# EAGLE board Adafruit PCB Reference Ruler - Edited (EAGLE 9.3.0)

Size 154.94 x 25.4 mm. Coordinates in mm from the lower left corner, seen from the top.
Outline: 0,0 0,25.4 154.94,25.4 154.94,0 0,0
Copper layers (1*16): Top 0.035mm / dielectric 1.5mm / Bottom 0.035mm
Design rules "adafruit_rules_1": minimum track width 8mil, minimum drill 15.5mil, track to track 8mil, track to pad 8mil, pad to pad 8mil, via to via 8mil, smd to smd 8mil, copper to edge 10mil, drill to drill 8mil, minimum pad ring 10mil, minimum via ring 8mil, stop-mask expansion 4mil, vias tented up to drill 25mil, thermal gap 10mil

## Footprints (pad centres in the part's own frame; a part is rotated, then mirrored left to right if it is on the bottom)
0201 = smd 0.3 x 0.3: P$1 -0.3,0; P$2 0.3,0
0402 = smd 0.5 x 0.6: 1 -0.5,0; 2 0.5,0
0603 = smd 0.6 x 0.9: 1 -0.75,0; 2 0.75,0
0805 = smd 1.2 x 1.3: 1 -1.05,0; 2 1.05,0
1206 = smd 0.9 x 1.6: 1 -1.45,0; 2 1.45,0
1210 = smd 1 x 2.8: 1 -1.5,0; 2 1.5,0
2010 = smd 1 x 2.8: P$1 -2.3,0; P$2 2.3,0
DPAK = smd 1.6 x 3: 1 -2.28,-5.31; 3 2.28,-5.31 | smd 4.826 x 5.715: 4 0,1.588
D2PAK = smd 1.6 x 3.5: 1 -2.54,-8.275; 3 2.54,-8.275 | smd 12.2 x 9.75: TAB 0,2
SOT223 = smd 1.219 x 2.235: 1 -2.311,-3.099; 2 0,-3.099; 3 2.311,-3.099 | smd 3.6 x 2.2: 4 0,3.099
SOT89 = smd 0.58 x 1.2: 1 -1.5,-1.8; 2 0,-1.8; 3 1.5,-1.8 | smd 2 x 2: 4 0,1.3
SOT23-5 = smd 0.55 x 1.2: 1 -0.95,-1.3; 2 0,-1.3; 3 0.95,-1.3; 4 0.95,1.3; 5 -0.95,1.3
SOT23-3 = smd 0.8 x 0.9: 1 -0.95,-1; 2 0.95,-1; 3 0,1.1
SC70 = smd 0.4 x 0.75: 1 -0.65,-0.825; 2 0,-0.825; 3 0.65,-0.825; 4 0.65,0.825; 5 -0.65,0.825
CRYSTAL-SMD-5X3.2 = smd 1.8 x 1.2: 1 -2,-1.2; 2 2,-1.2; 3 2,1.2; 4 -2,1.2
CRYSTAL-SMD-3.2X2.5 = smd 1.4 x 1.2: 1 -1.2,-0.95; 2 1.2,-0.95; 3 1.2,0.95; 4 -1.2,0.95
CRYSTAL-SMD-2.5X2 = smd 1.05 x 0.9: 1 -0.795,-0.6; 2 0.795,-0.6; 3 0.795,0.6; 4 -0.795,0.6
HC49UP = smd 5.334 x 1.93: 1 -4.826,0; 2 4.826,0
XTAL-2X1.2 = smd 1 x 1.4: P$1 -0.85,0; P$2 0.85,0
MICROMELF-R = smd 0.8 x 1.2: A 0.8,0; C -0.8,0
SC79_INFINEON = smd 0.35 x 0.35: A 0.675,0; C -0.675,0
SMA-DIODE = smd 1.27 x 1.47: A -2.15,0; C 2.15,0
SMB-DIODE = smd 2.4 x 2.4: A 2.2,0; C -2.2,0
SMC = smd 2.8 x 3.8: A 3.7,0; C -3.7,0
ALL-HOLES = hole 3.26: 43.004,-1.63 | hole 2.91: 39.118,-1.455 | hole 2.59: 35.569,-1.295 | hole 2.3: 32.324,-1.15 | hole 2.05: 29.349,-1.025 | hole 1.83: 26.608,-0.915 | hole 1.63: 24.078,-0.815 | hole 1.45: 21.738,-0.725 | hole 1.29: 19.569,-0.645 | hole 1.15: 17.549,-0.575 | hole 1.02: 15.664,-0.51 | hole 0.912: 13.898,-0.456 | hole 0.812: 12.236,-0.406 | hole 0.723: 10.668,-0.361 | hole 0.644: 9.144,-0.322 | hole 0.573: 7.62,-0.286 | hole 0.511: 6.096,-0.256 | hole 0.455: 4.572,-0.228 | hole 0.405: 3.048,-0.203 | hole 0.361: 1.524,-0.18 | hole 0.321: 0,-0.161
SOD-128 = smd 1.4 x 2.1: A 2.2,0; C -2.2,0
SOD-323 = smd 0.63 x 0.83: 1 -1.15,0; 2 1.15,0
SOD80C = smd 1.4 x 1.8: A 1.7,0; C -1.7,0
QFN-24 = smd 0.8 x 0.25: 1 -2,1.25; 2 -2,0.75; 3 -2,0.25; 4 -2,-0.25; 5 -2,-0.75; 6 -2,-1.25; 13 2,-1.25; 14 2,-0.75; 15 2,-0.25; 16 2,0.25; 17 2,0.75; 18 2,1.25 | smd 0.25 x 0.8: 7 -1.25,-2; 8 -0.75,-2; 9 -0.25,-2; 10 0.25,-2; 11 0.75,-2; 12 1.25,-2; 19 1.25,2; 20 0.75,2; 21 0.25,2; 22 -0.25,2; 23 -0.75,2; 24 -1.25,2
TSSOP16 = smd 0.35 x 1.6: 1 -2.225,-2.85; 2 -1.575,-2.85; 3 -0.925,-2.85; 4 -0.275,-2.85; 5 0.375,-2.85; 6 1.025,-2.85; 7 1.675,-2.85; 8 2.325,-2.85; 9 2.325,3.05; 10 1.675,3.05; 11 1.025,3.05; 12 0.375,3.05; 13 -0.275,3.05; 14 -0.925,3.05; 15 -1.575,3.05; 16 -2.225,3.05
SO08 = smd 0.61 x 2.21: 1 -1.905,-2.616; 2 -0.635,-2.616; 3 0.635,-2.616; 4 1.905,-2.616; 5 1.905,2.616; 6 0.635,2.616; 7 -0.635,2.616; 8 -1.905,2.616
TQFP32-5MM = smd 1.143 x 0.254: 1 -3.5,1.75; 2 -3.5,1.25; 3 -3.5,0.75; 4 -3.5,0.25; 5 -3.5,-0.25; 6 -3.5,-0.75; 7 -3.5,-1.25; 8 -3.5,-1.75; 17 3.5,-1.75; 18 3.5,-1.25; 19 3.5,-0.75; 20 3.5,-0.25; 21 3.5,0.25; 22 3.5,0.75; 23 3.5,1.25; 24 3.5,1.75 | smd 0.254 x 1.143: 9 -1.75,-3.5; 10 -1.25,-3.5; 11 -0.75,-3.5; 12 -0.25,-3.5; 13 0.25,-3.5; 14 0.75,-3.5; 15 1.25,-3.5; 16 1.75,-3.5; 25 1.75,3.5; 26 1.25,3.5; 27 0.75,3.5; 28 0.25,3.5; 29 -0.25,3.5; 30 -0.75,3.5; 31 -1.25,3.5; 32 -1.75,3.5
SOT23-6 = smd 0.55 x 1.2: 1 -0.95,-1.3; 2 0,-1.3; 3 0.95,-1.3; 4 0.95,1.3; 5 0,1.3; 6 -0.95,1.3
USB-C-16P-NOHOLE = smd 0.3 x 1.45: A5 -1.25,0; A6 -0.25,0; A7 0.25,0; A8 1.25,0; B5 1.75,0; B6 0.75,0; B7 -0.75,0; B8 -1.75,0 | smd 0.6 x 1.45: GND -3.225,0; GND2 3.225,0 | smd 1 x 2.1: SHLD1 -4.32,-0.915; SHLD2 4.32,-0.915 | smd 1 x 1.6: SHLD5 -4.32,-5.095; SHLD8 4.32,-5.095 | smd 0.55 x 1.45: VBUS1 -2.45,0; VBUS2 2.45,0
USB-MICROB-PTH-NOHOLE = smd 0.4 x 1.75: D+ 0.006,-0.015; D- -0.644,-0.015; GND 1.306,-0.015; ID 0.656,-0.015; VBUS -1.294,-0.015 | smd 2 x 1.46: SHEILD2 2.806,0.26; SHIELD -2.806,0.26 | smd 1.425 x 2.5: SHIELD3 -0.966,-2.695; SHIELD4 0.971,-2.698
USB-MINIB-NOHOLE = smd 2.5 x 0.5: D+ 2.5,0; D- 2.5,0.8; GND 2.5,-1.6; ID 2.5,-0.8; VBUS 2.5,1.6 | smd 2.5 x 2: S1 -3,4.5; S2 2.5,4.5; S3 -3,-4.5; S4 2.5,-4.5
JST04_1MM_RA = smd 0.6 x 1.35: 1 -1.5,0; 2 -0.5,0; 3 0.5,0; 4 1.5,0 | smd 1.2 x 2: NC1 2.8,-3.675; NC2 -2.8,-3.675
WS2812B = smd 2 x 1.25: 1-VDD 2.7,-1.65; 2-DOUT 2.7,1.65; 3-GND -2.7,1.65; 4-DIN -2.7,-1.65
TACTILE_SWITCH_SMD_6.0X3.5MM = smd 2.3 x 1.6: 1 -3.15,0; 2 3.15,0
ATTINY85 = smd 1.524 x 0.762: 1 -3.683,1.905; 2 -3.683,0.635; 3 -3.683,-0.635; 4 -3.683,-1.905; 5 3.727,-1.905; 6 3.727,-0.635; 7 3.727,0.635; 8 3.727,1.905
TQFP32-08 = smd 1.27 x 0.559: 1 -4.293,2.8; 2 -4.293,2; 3 -4.293,1.2; 4 -4.293,0.4; 5 -4.293,-0.4; 6 -4.293,-1.2; 7 -4.293,-2; 8 -4.293,-2.8; 17 4.293,-2.8; 18 4.293,-2; 19 4.293,-1.2; 20 4.293,-0.4; 21 4.293,0.4; 22 4.293,1.2; 23 4.293,2; 24 4.293,2.8 | smd 0.559 x 1.27: 9 -2.8,-4.293; 10 -2,-4.293; 11 -1.2,-4.293; 12 -0.4,-4.293; 13 0.4,-4.293; 14 1.2,-4.293; 15 2,-4.293; 16 2.8,-4.293; 25 2.8,4.293; 26 2,4.293; 27 1.2,4.293; 28 0.4,4.293; 29 -0.4,4.293; 30 -1.2,4.293; 31 -2,4.293; 32 -2.8,4.293
TQFP-48 = smd 1.5 x 0.28: 1 -4.25,2.75; 2 -4.25,2.25; 3 -4.25,1.75; 4 -4.25,1.25; 5 -4.25,0.75; 6 -4.25,0.25; 7 -4.25,-0.25; 8 -4.25,-0.75; 9 -4.25,-1.25; 10 -4.25,-1.75; 11 -4.25,-2.25; 12 -4.25,-2.75; 25 4.25,-2.75; 26 4.25,-2.25; 27 4.25,-1.75; 28 4.25,-1.25; 29 4.25,-0.75; 30 4.25,-0.25; 31 4.25,0.25; 32 4.25,0.75; 33 4.25,1.25; 34 4.25,1.75; 35 4.25,2.25; 36 4.25,2.75 | smd 0.28 x 1.5: 13 -2.75,-4.25; 14 -2.25,-4.25; 15 -1.75,-4.25; 16 -1.25,-4.25; 17 -0.75,-4.25; 18 -0.25,-4.25; 19 0.25,-4.25; 20 0.75,-4.25; 21 1.25,-4.25; 22 1.75,-4.25; 23 2.25,-4.25; 24 2.75,-4.25; 37 2.75,4.25; 38 2.25,4.25; 39 1.75,4.25; 40 1.25,4.25; 41 0.75,4.25; 42 0.25,4.25; 43 -0.25,4.25; 44 -0.75,4.25; 45 -1.25,4.25; 46 -1.75,4.25; 47 -2.25,4.25; 48 -2.75,4.25
SPARKFUN-DIGITALIC_TQFP44 = smd 1.5 x 0.5: 1 -5.8,4; 2 -5.8,3.2; 3 -5.8,2.4; 4 -5.8,1.6; 5 -5.8,0.8; 6 -5.8,0; 7 -5.8,-0.8; 8 -5.8,-1.6; 9 -5.8,-2.4; 10 -5.8,-3.2; 11 -5.8,-4; 23 5.8,-4; 24 5.8,-3.2; 25 5.8,-2.4; 26 5.8,-1.6; 27 5.8,-0.8; 28 5.8,0; 29 5.8,0.8; 30 5.8,1.6; 31 5.8,2.4; 32 5.8,3.2; 33 5.8,4 | smd 0.5 x 1.5: 12 -4,-5.8; 13 -3.2,-5.8; 14 -2.4,-5.8; 15 -1.6,-5.8; 16 -0.8,-5.8; 17 0,-5.8; 18 0.8,-5.8; 19 1.6,-5.8; 20 2.4,-5.8; 21 3.2,-5.8; 22 4,-5.8; 34 4,5.8; 35 3.2,5.8; 36 2.4,5.8; 37 1.6,5.8; 38 0.8,5.8; 39 0,5.8; 40 -0.8,5.8; 41 -1.6,5.8; 42 -2.4,5.8; 43 -3.2,5.8; 44 -4,5.8

## Placement (x,y rotation side)
E$1  [EDGE-MILLIMETERS]  1.2,0 0 top
E$2  [EDGE-MILLIMETERS]  11.2,0 0 top
E$3  [EDGE-MILLIMETERS]  21.2,0 0 top
E$4  [EDGE-MILLIMETERS]  31.2,0 0 top
E$5  [EDGE-MILLIMETERS]  41.2,0 0 top
E$6  [EDGE-MILLIMETERS]  51.2,0 0 top
E$7  [EDGE-MILLIMETERS]  61.2,0 0 top
E$8  [EDGE-MILLIMETERS]  71.2,0 0 top
E$9  [EDGE-MILLIMETERS]  81.2,0 0 top
E$10  [EDGE-MILLIMETERS]  91.2,0 0 top
E$11  [EDGE-MILLIMETERS]  101.2,0 0 top
E$12  [EDGE-MILLIMETERS]  111.2,0 0 top
E$13  [EDGE-MILLIMETERS]  121.2,0 0 top
E$14  [EDGE-MILLIMETERS]  131.2,0 0 top
E$15  [EDGE-MILLIMETERS]  141.2,0 0 top
E$16  [0201]  19.05,10.46 90 top
E$17  [EDGE-INCHES-EIGTH]  1.27,25.4 0 top
E$18  [EDGE-INCHES-EIGTH]  26.67,25.4 0 top
E$19  [EDGE-INCHES-EIGTH]  52.07,25.4 0 top
E$20  [EDGE-INCHES-EIGTH]  77.47,25.4 0 top
E$21  [EDGE-INCHES-EIGTH]  102.87,25.4 0 top
E$22  [EDGE-INCHES-EIGTH]  128.27,25.4 0 top
E$23  [0402]  20.57,10.16 90 top
E$24  [0603]  22.1,9.86 90 top
E$25  [0805]  23.62,9.27 90 top
E$26  [1206]  25.58,9.02 90 top
E$27  [1210]  28.3,8.92 270 top
E$28  [2010]  31.62,8.13 90 top
E$29  [DPAK]  74.93,14.1 0 top
E$30  [D2PAK]  85.09,14.22 0 top
E$31  [SOT223]  67.56,9.65 0 top
E$32  [SOT89]  67.56,18.03 0 top
E$33  [SOT23-5]  61.98,13.46 0 top
E$34  [SOT23-3]  61.98,18.8 0 top
E$35  [SC70]  61.98,8.13 0 top
E$36  [CRYSTAL-SMD-5X3.2]  94.51,16.89 90 top
E$37  [CRYSTAL-SMD-3.2X2.5]  100.84,17.88 90 top
E$38  [CRYSTAL-SMD-2.5X2]  106.58,18.49 90 top
E$39  [HC49UP]  100.33,7.87 0 top
E$40  [XTAL-2X1.2]  106.43,12.7 0 top
E$41  [MICROMELF-R]  36.07,6.55 90 top
E$42  [SC79_INFINEON]  34.54,6.2 90 top
E$43  [SMA-DIODE]  45.87,8.15 270 top
E$44  [SMB-DIODE]  49.78,8.76 90 top
E$45  [SMC]  55.35,10.44 90 top
E$46  [ALL-HOLES]  109.22,19.3 0 top
E$47  [SOD-128]  42.67,8.28 90 top
E$48  [SOD-323]  37.85,6.81 270 top
E$49  [SOD80C]  39.88,7.75 90 top
E$50  [NMOS-SYMB]  144.78,8.13 0 top
E$51  [PMOS-SYMB]  136.91,8.13 0 top
E$52  [DIODE-SYMB]  147.07,14.22 0 top
E$53  [LED-GUIDE]  135.89,13.97 270 top
E$54  [NPN-SYMB]  129.29,6.86 0 top
E$55  [QFN-24]  112.78,14.73 0 top
E$56  [TSSOP16]  112.78,7.87 270 top
E$57  [SO08]  121.16,6.86 270 top
E$58  [TQFP32-5MM]  121.16,13.97 0 top
E$59  [PNP-SYMB]  129.29,14.22 0 top
E$60  [0201]  19.05,5.79 90 top
E$61  [0402]  20.57,6.1 90 top
E$62  [0603]  22.1,6.38 90 top
E$63  [0201]  19.05,8.13 90 top
IC1  ATTINY10  [SOT23-6]  102.11,12.45 180 bottom
J1  [USB-C-16P-NOHOLE]  18.8,19.56 0 bottom
J2  [USB-MICROB-PTH-NOHOLE]  32.26,8.89 0 bottom
J3  USB_MINI-B  [USB-MINIB-NOHOLE]  32.26,17.02 90 bottom
J4  [JST04_1MM_RA]  18.8,10.92 0 bottom
RGB1  WS2812B  [WS2812B]  6.86,16.51 0 bottom
S1  MOMENTARY-SWITCH-SPST-SMD-6.0X3.5MM  [TACTILE_SWITCH_SMD_6.0X3.5MM]  6.86,8.89 0 bottom
U1  ATTINY85  [ATTINY85]  89.92,12.45 270 bottom
U2  ATMEGA328P_TQFP  [TQFP32-08]  63.25,12.45 0 bottom
U3  ATSAMD21G-A  [TQFP-48]  76.45,12.45 0 bottom
U$1  ATMEGA32U4TQFP  [SPARKFUN-DIGITALIC_TQFP44]  48.26,12.45 0 bottom
U$2  LOGOLOGO-S  [LOGO-S]  154.18,3.56 0 bottom

## Library data of the parts
E$1-E$63 = Reference Ruler
IC1 = adafruit
J1-J3 = SparkFun-Connectors
J4 = SparkFun-Connectors; PROD_ID: CONN-13694
RGB1 = LED
S1 = SparkFun-Switches; PROD_ID: SWCH-00815; SF_SKU: COM-08229
U1 = SparkFun-IC-Microcontroller; PROD_ID: IC-09092
U2 = SparkFun-IC-Microcontroller; PROD_ID: IC-09069
U3 = SparkFun-IC-Microcontroller; PROD_ID: IC-13064
U$1 = SparkFun-Retired; PROD_ID: IC-11161
U$2 = fabl3r

## Nets
1: J4.1
2: J4.2
GND: J2.GND
N$1: J3.VBUS
N$2: J3.GND
N$3: J1.GND J1.GND2
N$4: J1.VBUS1 J1.VBUS2
N$5: IC1.2
VBUS: J2.VBUS
VCC: IC1.5

## Tracks (layer width: path | path; a pad name or v marks a point on that pad's centre or on a via)
N$3  (1 unrouted)
N$4  (1 unrouted)
(copper drawn outside any net)
  shapes: Top area x8

## Text on the board
Bottom: Mini-USB SMD | Good luck don't fail! | USB-C x16 | WS2812B | ATmega32U4 | ATmega328P | ATSAMD21G18 | ATtiny85 | ATtiny10 | Design By | SOT-23 x6 / 1.0mm Pitch | fabl3r | TQFP x32 / 0.8mm Pitch | TQFP x48 / 0.5mm Pitch | SOIJ x8 / 1.3mm Pitch | 6.0x3.5mm / Switch | Micro-USB SMD | JST SH x4 / QT/Qwiic | TQFP x44 / 0.8mm Pitch | Based off Adafruit Ruler - (CC BY-SA 3.0) @fabl3r @Bairminer @alphasymx
tPlace: 1/8 | 6 | 3 | 0 | 1 | 2 | SOT89 | XTAL/OSC | 4 | 5 | AWG | 28 | 27 | 26 | 25 | 24 | 23 | 22 | 21 | 20 | 19 | 18 | 17 | 16 | 15 | 14 | 13 | 12 | 11 | 10 | 9 | 8 | Trace Width (mil) | 6 | Common Diodes / and Transistors | 8 | SOT23 | 2.5X2 | 3.2X2.4 | 10 | 12 | SMB | 2X1.2 | QFN | QFP | SOD128 | SMC | 5X3.2 | 18 | 0201(0603) / 0402(1005) / 0603(1608) / 0805(2012) | 1206(3216) | 1210(3225) | 2010(5025) | SOD80 | MiniMELF | SMA | DPAK | 24 | D2PAK | 80 | SOD323 | SOT223 | 30 | SC79 | MicroMELF | 60 | 40 | SMD R/C/L | Imperial (Metric) | HC49 | SC70 | SSOP | 50 | SOIC | Font Size | 40mil | 0 | 1 | 2 | 3 | 4 | 5 | 6 | 7 | 9 | 10 | 11 | 12 | 13 | 14 | 15 | 8
bStop: Mini-USB SMD | Good luck don't fail! | USB-C x16 | WS2812B | ATmega32U4 | ATmega328P | ATSAMD21G18 | ATtiny85 | ATtiny10 | Design By | SOT-23 x6 / 1.0mm Pitch | fabl3r | TQFP x32 / 0.8mm Pitch | TQFP x48 / 0.5mm Pitch | SOIJ x8 / 1.3mm Pitch | 6.0x3.5mm / Switch | Micro-USB SMD | JST SH x4 / QT/Qwiic | TQFP x44 / 0.8mm Pitch | Based off Adafruit Ruler - (CC BY-SA 3.0) @fabl3r @Bairminer @alphasymx